# EAGLE board PROFET+_24V_Shield_wo_OL_V1.2 (EAGLE 6.2)
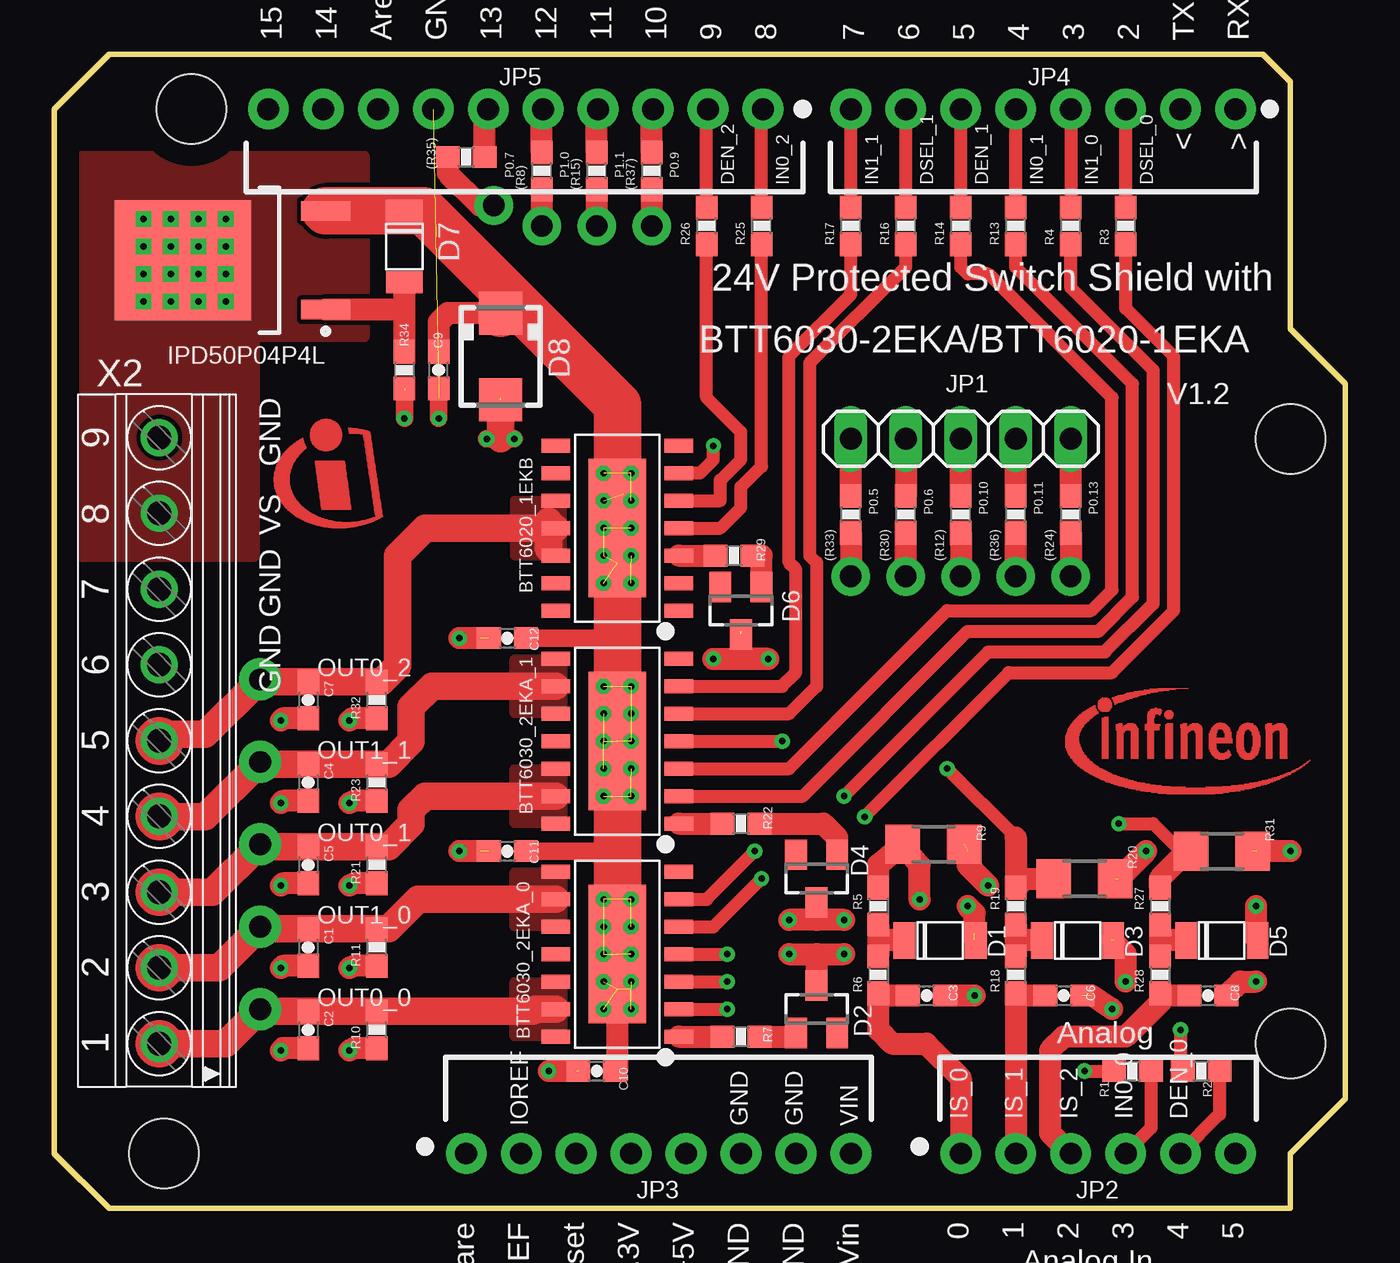
[diagram p0: board, top side]
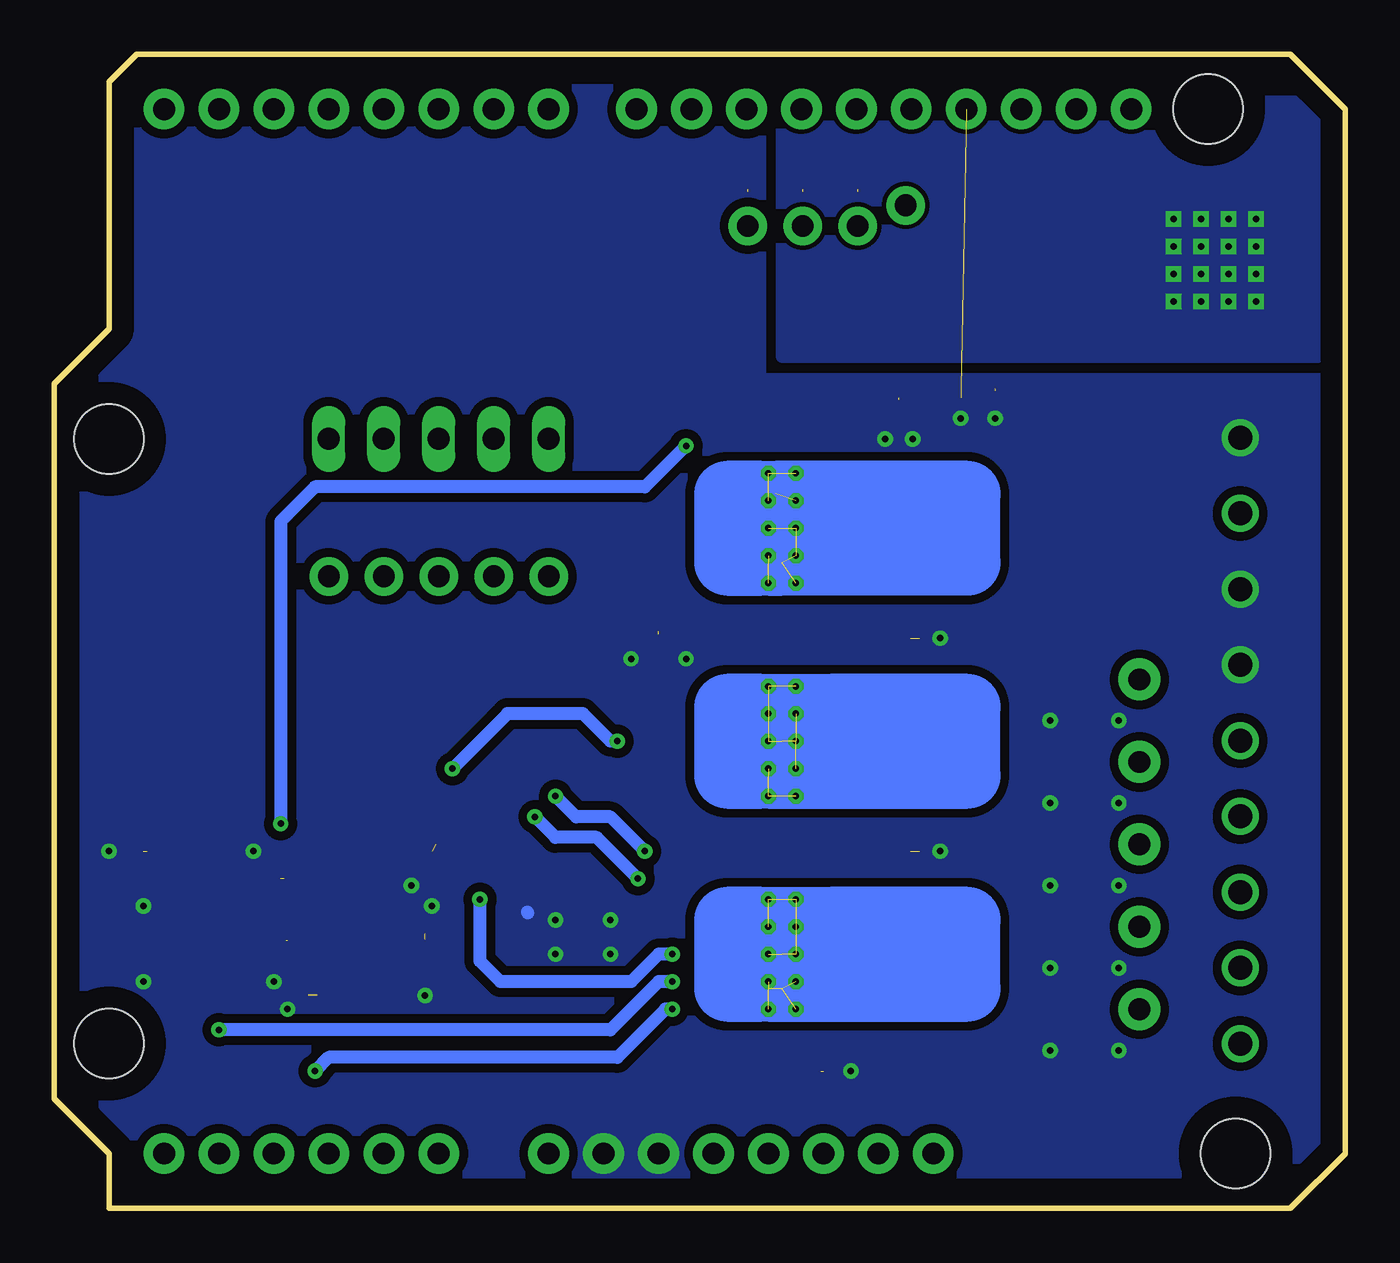
[diagram p1: board, bottom side, seen from below]

Size 59.69 x 53.34 mm. Coordinates in mm from the lower left corner, seen from the top.
Copper layers (1*16): Top 0.035mm / dielectric 1.5mm / Bottom 0.035mm
Design rules: minimum track width 10mil, minimum drill 23mil, track to track 8mil, track to pad 8mil, pad to pad 8mil, via to via 8mil, smd to smd 8mil, copper to edge 40mil, drill to drill 8mil, minimum pad ring 10mil, minimum via ring 8mil, stop-mask expansion 4mil, vias tented up to drill 0mil, thermal gap 10mil

## Footprints (pad centres in the part's own frame; a part is rotated, then mirrored left to right if it is on the bottom)
0603-RES = smd 1.1 x 1: 1 -0.85,0; 2 0.85,0
IFX_PG_DSO_14_47_EP = smd 2.65 x 6.4: EP 0,0 | smd 1.31 x 0.64: P1 -2.845,3.81; P2 -2.845,2.54; P3 -2.845,1.27; P4 -2.845,0; P5 -2.845,-1.27; P6 -2.845,-2.54; P7 -2.845,-3.81; P8 2.845,-3.81; P9 2.845,-2.54; P10 2.845,-1.27; P11 2.845,0; P12 2.845,1.27; P13 2.845,2.54; P14 2.845,3.81
IFX_PG_DSO_14_40_EP = smd 2.65 x 6.4: EP 0,0 | smd 1.31 x 0.64: P1 -2.845,3.81; P2 -2.845,2.54; P3 -2.845,1.27; P4 -2.845,0; P5 -2.845,-1.27; P6 -2.845,-2.54; P7 -2.845,-3.81; P8 2.845,-3.81; P9 2.845,-2.54; P10 2.845,-1.27; P11 2.845,0; P12 2.845,1.27; P13 2.845,2.54; P14 2.845,3.81
0603-CAP = smd 1.1 x 1: 1 -0.85,0; 2 0.85,0
SMD-PACKAGES_SOD80 = smd 1 x 1.7: A -1.65,0; K 1.65,0
SOT23 = smd 1 x 1.4: 1 -0.95,-1.1; 2 0.95,-1.1; 3 0,1.1
SMA = smd 2 x 2: A 2,0; C -2,0
INF-PG-TO252-3-313_L_1PRIMARY = smd 2.25 x 0.9: 1 -4.3,2.28; 3 -4.3,-2.28 | smd 6.3 x 5.55: 2 2.3,0
1X05 = drill 1.016 long: 1 -5.08,0; 2 -2.54,0; 3 0,0; 4 2.54,0; 5 5.08,0
R1206 = smd 1.6 x 1.803: 1 -1.422,0; 2 1.422,0
XMC1100_FOR_ARDUINO = drill 1.016 pad 1.88: 3.3V 26.67,2.54; 5V 29.21,2.54; 14 12.446,50.8; 15 9.906,50.8; A0 41.91,2.54; A1 44.45,2.54; A2 46.99,2.54; A3 49.53,2.54; A4 52.07,2.54; A5 54.61,2.54; AREF 14.986,50.8; D2 49.53,50.8; D3 46.99,50.8; D4 44.45,50.8; D5 41.91,50.8; D6 39.37,50.8; D7 36.83,50.8; D8 32.766,50.8; D9 30.226,50.8; D10 27.686,50.8; D11 25.146,50.8; D12 22.606,50.8; D13 20.066,50.8; GND@0 31.75,2.54; GND@1 34.29,2.54; GND@2 17.526,50.8; IOREF 21.59,2.54; RES 24.13,2.54; RX 54.61,50.8; SPARE 19.05,2.54; TX 52.07,50.8; VIN 36.83,2.54 | hole 3.2: 57.15,35.56; 57.15,7.62; 6.35,50.8; 5.08,2.54
1751316 = drill 1.1 pad 1.7: 1 -13.973,-0.1; 2 -10.473,-0.1; 3 -6.973,-0.1; 4 -3.473,-0.1; 5 0.028,-0.1; 6 3.527,-0.1; 7 7.027,-0.1; 8 10.527,-0.1; 9 14.027,-0.1

## Placement (x,y rotation side)
(R8)  10k  [0603-RES]  22.54,47.94 90 top
(R12)  10k  [0603-RES]  41.91,32.07 90 top
(R15)  10k  [0603-RES]  25.08,47.94 90 top
(R24)  10k  [0603-RES]  46.99,32.07 90 top
(R30)  10k  [0603-RES]  39.37,32.07 90 top
(R33)  10k  [0603-RES]  36.83,32.07 90 top
(R35)  10k  [0603-RES]  19.05,48.58 0 top
(R36)  10k  [0603-RES]  44.45,32.07 90 top
(R37)  10k  [0603-RES]  27.62,47.94 90 top
BTT6020_1EKB  INFINEON_BTS5008-1EKB_2  [IFX_PG_DSO_14_47_EP]  26.04,31.43 180 top
BTT6030_2EKA_0  INFINEON_BTS5020-2EKA  [IFX_PG_DSO_14_40_EP]  26.04,11.75 180 top
BTT6030_2EKA_1  INFINEON_BTS5020-2EKA  [IFX_PG_DSO_14_40_EP]  26.04,21.59 180 top
C1  10n  [0603-CAP]  11.75,12.07 270 top
C2  10n  [0603-CAP]  11.75,8.25 270 top
C3  100p  [0603-CAP]  40.32,9.84 0 top
C4  10n  [0603-CAP]  11.75,19.68 270 top
C5  10n  [0603-CAP]  11.75,15.88 270 top
C6  100p  [0603-CAP]  46.67,9.84 0 top
C7  10n  [0603-CAP]  11.75,23.5 270 top
C8  100p  [0603-CAP]  53.34,9.84 0 top
C9  68n  [0603-CAP]  17.78,38.73 90 top
C10  100n  [0603-CAP]  25.08,6.35 0 top
C11  100n  [0603-CAP]  20.96,16.51 0 top
C12  100n  [0603-CAP]  20.96,26.35 0 top
D1  6.8V  [SMD-PACKAGES_SOD80]  40.96,12.38 180 top
D2  BAS21  [SOT23]  35.24,9.21 0 top
D3  6.8V  [SMD-PACKAGES_SOD80]  47.31,12.38 180 top
D4  BAS21  [SOT23]  35.24,15.24 180 top
D5  6.8V  [SMD-PACKAGES_SOD80]  53.98,12.38 180 top
D6  BAS21  [SOT23]  31.75,27.62 180 top
D7  10V  [SMD-PACKAGES_SOD80]  16.19,44.45 90 top
D8  58V  [SMA]  20.64,39.37 270 top
IPD50P04P4L  INF-PG-TO252-3-313_L_1  [INF-PG-TO252-3-313_L_1PRIMARY]  8.26,43.81 180 top
JP1  [1X05]  41.91,35.56 0 top
R1  10k  [0603-RES]  49.85,6.35 0 top
R2  10k  [0603-RES]  53.02,6.35 0 top
R3  10k  [0603-RES]  49.53,45.4 90 top
R4  10k  [0603-RES]  46.99,45.4 90 top
R5  10k  [0603-RES]  38.1,13.97 270 top
R6  4.7k  [0603-RES]  38.1,10.79 270 top
R7  27  [0603-RES]  31.75,7.94 0 top
R9  1.2k  [R1206]  40.64,16.83 180 top
R10  47k  [0603-RES]  14.92,8.25 90 top
R11  47k  [0603-RES]  14.92,12.07 90 top
R13  10k  [0603-RES]  44.45,45.4 90 top
R14  10k  [0603-RES]  41.91,45.4 90 top
R16  10k  [0603-RES]  39.37,45.4 90 top
R17  10k  [0603-RES]  36.83,45.4 90 top
R18  4.7k  [0603-RES]  44.45,10.79 270 top
R19  10k  [0603-RES]  44.45,13.97 270 top
R20  1.2k  [R1206]  47.63,15.24 180 top
R21  47k  [0603-RES]  14.92,15.88 90 top
R22  27  [0603-RES]  31.75,17.78 0 top
R23  47k  [0603-RES]  14.92,19.68 90 top
R25  4.7k  [0603-RES]  32.7,45.4 90 top
R26  4.7k  [0603-RES]  30.16,45.4 90 top
R27  4.7k  [0603-RES]  51.12,13.97 270 top
R28  4.7k  [0603-RES]  51.12,10.79 270 top
R29  27  [0603-RES]  31.43,30.16 0 top
R31  1.2k  [R1206]  53.98,16.51 180 top
R32  47k  [0603-RES]  14.92,23.5 90 top
R34  10k  [0603-RES]  16.19,38.73 270 top
SHAPE1  ARDUINO_SHIELD  [XMC1100_FOR_ARDUINO]  0,0 0 top
U$3  [INFINEON_LOGO_5]  46.35,18.73 0 top
U$6  [INFINEON_ICON_5]  10.16,31.43 0 top
X2  1751316  [1751316]  4.76,21.59 90 top

## Library data of the parts
(R8) (R12) (R15) (R24) (R30) (R33) (R35) (R36) (R37) C1-C12 R1-R7 R10 R11 R13 R14 R16-R19 R21-R23 R25-R29 R32 R34 = SparkFun
BTT6020_1EKB BTT6030_2EKA_0 BTT6030_2EKA_1 = PROFET+_EAGLE_Library
D1 D3 D5 D7 = NovalithIC_H-Bridge_Demo_Board_V2_2
D2 D4 D6 = diode
D8 = diode_suppressor_smc
IPD50P04P4L = IPD50P04P4L-11
JP1 = pinhead
R9 R20 R31 = resistor
SHAPE1 = arduino
U$3 U$6 = infineon_logo
X2 = con-phoenix-350; OC_FARNELL: unknown; OC_NEWARK: unknown

## Nets
DEN_0: R2.2 SHAPE1.A4
DEN_1: R14.2 SHAPE1.D5
DEN_2: R26.2 SHAPE1.D9
DSEL_0: R3.2 SHAPE1.D2
DSEL_1: R16.2 SHAPE1.D6
GND: C1.2 C2.2 C3.2 C4.2 C5.2 C6.2 C7.2 C8.2 C9.1 C10.1 C11.1 C12.1 D1.A D2.3 D3.A D4.3 D5.A D6.3 D8.A R9.1 R10.1 R11.1 R20.1 R21.1 R23.1 R31.1 R32.1 R34.2 SHAPE1.GND@0 SHAPE1.GND@1 SHAPE1.GND@2 X2.6 X2.7 X2.9
IN0_0: R1.2 SHAPE1.A3
IN0_1: R13.2 SHAPE1.D4
IN0_2: R25.2 SHAPE1.D8
IN1_0: R4.2 SHAPE1.D3
IN1_1: R17.2 SHAPE1.D7
IS_0: C3.1 R6.2 SHAPE1.A0
IS_1: C6.1 R18.2 SHAPE1.A1
IS_2: C8.1 R28.2 SHAPE1.A2
N$1: BTT6030_2EKA_1.P5 R16.1
N$2: (R12).1
N$3: D7.A IPD50P04P4L.1 R34.1
N$4: BTT6030_2EKA_1.P6 R17.1
N$5: BTT6030_2EKA_1.P3 R14.1
N$6: D2.1 R7.2
N$7: BTT6030_2EKA_1.P2 R13.1
N$8: BTT6030_2EKA_1.P1 R22.1
N$9: BTT6030_2EKA_1.P4 R19.1 R20.2
N$10: D4.1 R22.2
N$11: D3.K R18.1 R19.2
N$12: BTT6030_2EKA_0.P5 R3.1
N$13: BTT6030_2EKA_0.P6 R4.1
N$14: BTT6030_2EKA_0.P3 R2.1
N$15: BTT6030_2EKA_0.P2 R1.1
N$16: BTT6030_2EKA_0.P1 R7.1
N$17: BTT6030_2EKA_0.P4 R5.1 R9.2
N$18: (R37).1
N$19: D1.K R5.2 R6.1
N$20: (R36).1
N$21: (R24).1
N$22: (R15).1
N$23: (R30).1
N$24: BTT6020_1EKB.P5 R26.1
N$25: BTT6020_1EKB.P4 R25.1
N$26: BTT6020_1EKB.P3 R29.1
N$27: BTT6020_1EKB.P6 R27.1 R31.2
N$28: D6.1 R29.2
N$29: D5.K R27.2 R28.1
N$31: (R33).1
N$33: (R8).1
N$34: (R35).1
OUT0_0: BTT6030_2EKA_0.P12 BTT6030_2EKA_0.P13 BTT6030_2EKA_0.P14 C2.1 R10.2 X2.1
OUT0_1: BTT6030_2EKA_1.P12 BTT6030_2EKA_1.P13 BTT6030_2EKA_1.P14 C5.1 R21.2 X2.3
OUT0_2: BTT6020_1EKB.P10 BTT6020_1EKB.P11 BTT6020_1EKB.P12 C7.1 R32.2 X2.5
OUT1_0: BTT6030_2EKA_0.P8 BTT6030_2EKA_0.P9 BTT6030_2EKA_0.P10 C1.1 R11.2 X2.2
OUT1_1: BTT6030_2EKA_1.P8 BTT6030_2EKA_1.P9 BTT6030_2EKA_1.P10 C4.1 R23.2 X2.4
P0.5: (R33).2 JP1.1
P0.6: (R30).2 JP1.2
P0.7: (R35).2 SHAPE1.D13
P0.9: (R37).2 SHAPE1.D10
P0.10: (R12).2 JP1.3
P0.11: (R36).2 JP1.4
P0.13: (R24).2 JP1.5
P1.0: (R8).2 SHAPE1.D12
P1.1: (R15).2 SHAPE1.D11
VBAT: IPD50P04P4L.2 X2.8
VS: BTT6020_1EKB.EP BTT6030_2EKA_0.EP BTT6030_2EKA_1.EP C9.2 C10.2 C11.2 C12.2 D7.K D8.C IPD50P04P4L.3

## Tracks (layer width: path | path; a pad name or v marks a point on that pad's centre or on a via)
DEN_0
  Top 0.61: R2.2 53.87,4.34 SHAPE1.A4
DEN_1
  Top 0.61: R14.2 SHAPE1.D5
DEN_2
  Top 0.61: R26.2 30.16,50.74 SHAPE1.D9
DSEL_0
  Top 0.61: R3.2 SHAPE1.D2
DSEL_1
  Top 0.61: R16.2 SHAPE1.D6
GND  (via drill 0.3)  (14 unrouted)
  Top 0.61: 31.75,25.4 31.75,26.67
  Top 0.813: 16.19,37.78 v16.19,36.51 | 17.78,37.47 v17.78,36.51 | v20,35.56 20.64,35.56 v21.27,35.56
  Top 1.016: 35.24,11.75 v36.51,11.75 | v36.51,13.34 35.24,13.34 | 35.24,13.34 v33.97,13.34 | v33.97,11.75 35.24,11.75 | 35.24,11.75 D2.3 | D3.A 48.9,12.45 | D5.A 55.56,12.45 v55.56,13.97 | C8.2 54.82,10.48 v55.56,10.48 | C3.2 v42.55,9.84 | D1.A 42.55,12.45 | C7.2 10.58,22.64 v10.48,22.54 | R32.1 13.76,22.64 v13.65,22.54 | C4.2 10.58,18.84 v10.48,18.73 | R23.1 13.87,18.84 v13.65,18.73 | C5.2 10.58,15.03 v10.48,14.92 | R21.1 13.87,15.03 v13.65,14.92 | C1.2 10.58,11.21 v10.48,11.11 | R11.1 13.87,11.21 v13.65,11.11 | R10.1 13.87,7.41 v13.65,7.3 | C2.2 10.58,7.41 v10.48,7.3 | D4.3 35.24,13.34 | v57.15,16.51 55.56,16.51 | 49.21,15.24 v50.48,16.51 | v49.53,10.48 49.53,11.75 48.9,12.38 | v48.9,9.21 47.94,9.84 | 42.55,12.7 42.55,13.65 v42.23,13.97 | 42.23,16.51 42.23,15.88 v43.18,14.92 | 19.68,26.35 v18.73,26.35 | 19.68,16.51 v18.73,16.51 | 24.13,6.35 v22.86,6.35 | v30.48,25.4 v33.02,25.4 31.75,25.4
  Top 1.27: 20.64,35.56 20.64,37.47
  Bottom 0.61: 37.82,13.69 37.78,13.65
  pour Bottom (isolate 0.406, no thermals): 1.27,38.42 1.27,1.59 58.42,1.59 58.42,51.75 26.99,51.75 26.99,38.42
IN0_0
  Top 0.61: R1.2 50.7,3.71 SHAPE1.A3
IN0_1
  Top 0.61: R13.2 SHAPE1.D4
IN0_2
  Top 0.61: R25.2 32.7,50.74 SHAPE1.D8
IN1_0
  Top 0.61: SHAPE1.D3 R4.2
IN1_1
  Top 0.61: R17.2 SHAPE1.D7
IS_0
  Top 1.016: C3.1 38.2,9.84 R6.2 38.1,8.25 38.74,7.62 40.32,7.62 41.91,6.03 SHAPE1.A0
IS_1
  Top 1.016: R18.2 44.55,9.84 | 44.55,9.84 C6.1 | 44.55,9.84 44.45,9.74 SHAPE1.A1
IS_2
  Top 1.016: R28.2 51.22,9.84 | 51.22,9.84 C8.1 | 51.22,9.84 51.22,9.63 49.53,7.94 46.67,7.94 46.04,7.3 46.04,3.49 SHAPE1.A2
N$1
  Top 0.61: BTT6030_2EKA_1.P5 33.97,22.86 35.24,24.13 35.24,29.85 34.93,30.16 34.93,39.05 39.37,43.5 R16.1
N$2  (via drill 1 pad 1.78)
  Top 1.016: (R12).1 v41.91,29.21
N$3
  Top 1.016: R34.1 16.19,41.54 | 16.19,41.54 D7.A | 16.19,41.54 IPD50P04P4L.1
N$4
  Top 0.61: BTT6030_2EKA_1.P6 33.66,24.13 34.29,24.77 34.29,29.53 33.97,29.85 33.97,39.37 36.83,42.23 R17.1
N$5
  Top 0.61: BTT6030_2EKA_1.P3 33.97,20.32 41.27,27.62 47.94,27.62 48.9,28.57 48.9,37.47 43.18,43.18 42.23,43.18 41.91,43.5 R14.1 41.91,44.45
N$6
  Top 1.016: R7.2 34.14,7.94 34.14,7.93 D2.1
N$7
  Top 0.61: BTT6030_2EKA_1.P2 34.61,19.05 42.23,26.67 48.26,26.67 49.85,28.26 49.85,38.1 44.45,43.5 R13.1
N$8
  Top 1.016: BTT6030_2EKA_1.P1 R22.1
N$9  (via drill 0.3)
  Top 0.61: BTT6030_2EKA_1.P4 v33.66,21.59 | v41.27,20.32 44.45,17.14
  Top 1.016: 44.45,17.14 R19.1 44.87,15.24 R20.2
  Bottom 0.61: v33.66,21.59 33.97,21.59 35.24,22.86 38.74,22.86 v41.27,20.32
N$10
  Top 1.016: R22.2 35.56,17.78 36.2,17.14 D4.1
N$11
  Top 1.016: R19.2 44.45,12.38 | 44.45,12.38 R18.1 | D3.K 44.45,12.38
N$12  (via drill 0.3)
  Top 0.61: BTT6030_2EKA_0.P5 30.48,13.02 v32.7,15.24 | v37.46,18.1 44.13,24.77 48.9,24.77 51.75,27.62 51.75,39.37 49.53,41.59 R3.1
  Bottom 0.61: v32.7,15.24 34.61,17.14 36.51,17.14 v37.46,18.1
N$13  (via drill 0.3)
  Top 0.61: BTT6030_2EKA_0.P6 30.16,14.29 v32.38,16.51 | v36.51,19.05 43.18,25.72 48.58,25.72 50.8,27.94 50.8,38.73 46.99,42.55 R4.1
  Bottom 0.61: v32.38,16.51 33.97,18.1 35.56,18.1 v36.51,19.05
N$14  (via drill 0.3)
  Top 0.61: BTT6030_2EKA_0.P3 v31.12,10.48 | v52.07,8.25 52.07,6.77 R2.1
  Bottom 0.61: v31.12,10.48 31.75,10.48 33.97,8.25 v52.07,8.25
N$15  (via drill 0.3)
  Top 0.61: BTT6030_2EKA_0.P2 v31.12,9.21 | v47.63,6.35 R1.1
  Bottom 0.61: v31.12,9.21 31.43,9.21 33.66,6.98 46.99,6.98 v47.63,6.35
N$16
  Top 1.016: BTT6030_2EKA_0.P1 R7.1
N$17  (via drill 0.3)
  Top 0.61: BTT6030_2EKA_0.P4 v31.12,11.75
  Top 1.016: R5.1 38.1,15.89 R9.2 40.01,15.86 v40.01,14.29
  Bottom 0.61: v31.12,11.75 31.75,11.75 33.02,10.48 39.05,10.48 40.01,11.43 v40.01,14.29
N$18  (via drill 1 pad 1.78)  (1 unrouted)
  Top 1.016: 27.62,46.99 v27.62,45.4
N$19
  Top 1.016: R5.2 38.1,12.38 | 38.1,12.38 R6.1 | D1.K 38.1,12.38
N$20  (via drill 1 pad 1.78)
  Top 1.016: v44.45,29.21 (R36).1
N$21  (via drill 1 pad 1.78)
  Top 1.016: (R24).1 v46.99,29.21
N$22  (via drill 1 pad 1.78)  (1 unrouted)
  Top 1.016: 25.08,46.99 v25.08,45.4
N$23  (via drill 1 pad 1.78)
  Top 1.016: v39.37,29.21 (R30).1
N$24
  Top 0.61: BTT6020_1EKB.P5 30.8,32.7 30.8,33.66 31.75,34.61 31.75,35.88 30.16,37.47 R26.1
N$25
  Top 0.61: BTT6020_1EKB.P4 30.8,31.43 31.75,32.39 31.75,33.34 32.7,34.29 R25.1
N$26
  Top 1.016: BTT6020_1EKB.P3 R29.1
N$27  (via drill 0.3)
  Top 0.61: R27.1 51.12,14.92 | v30.48,35.24 30.48,34.61 29.85,33.97 BTT6020_1EKB.P6 | 52.22,16.36 50.8,17.78 v49.21,17.78
  Top 1.016: R27.1 51.12,15.25 52.22,16.36 R31.2
  Bottom 0.61: v30.48,35.24 32.38,33.34 47.63,33.34 49.21,31.75 v49.21,17.78
N$28
  Top 1.016: D6.1 32.7,30.16 R29.2
N$29
  Top 1.016: R27.2 51.12,12.38 | 51.12,12.38 R28.1 | D5.K 51.12,12.38
N$31  (via drill 1 pad 1.78)
  Top 1.016: (R33).1 v36.83,29.21
N$33  (via drill 1 pad 1.78)  (1 unrouted)
  Top 1.016: 22.54,46.99 v22.54,45.4
N$34  (via drill 1 pad 1.78)
  Top 1.016: 20,46.36 v20.32,46.36 19.68,46.36 18.2,47.84 (R35).1
OUT0_0  (via drill 1 pad 1.93)
  Top 1.27: X2.1 7.94,7.62 9.42,9.11 9.52,9.11 | 9.52,9.11 C2.1 R10.2 22.12,9.11 22.23,9.21 BTT6030_2EKA_0.P13 | v9.52,9.21 9.52,9.11
  Top 2.184: X2.1
  pour Top (no thermals): 23.49,10.48 23.49,7.94 21.27,7.94 21.27,10.48
OUT0_1  (via drill 1 pad 1.93)
  Top 1.27: 9.42,16.72 C5.1 R21.2 15.46,16.72 16.51,17.78 16.51,18.42 17.15,19.05 BTT6030_2EKA_1.P13 | 9.42,16.72 7.3,14.61 4.88,14.61 | 9.42,16.72 v9.52,16.83
  Top 2.184: 4.88,14.61 X2.3
  pour Top (no thermals): 23.49,20.32 23.49,17.78 21.27,17.78 21.27,20.32
OUT0_2  (via drill 1 pad 1.93)
  Top 0.813: v9.52,24.45 9.52,24.35
  Top 1.27: 4.89,21.59 5.21,21.91 6.98,21.91 9.42,24.35 9.52,24.35 C7.1 R32.2 15.14,24.35 15.88,25.08 15.88,30.16 17.15,31.43 BTT6020_1EKB.P11 | 22.86,31.75 22.86,30.48
  Top 2.184: 4.89,21.59 X2.5
  pour Top (no thermals): 21.27,30.16 23.49,30.16 23.49,32.7 21.27,32.7
OUT1_0  (via drill 1 pad 1.93)
  Top 1.27: X2.2 7.62,11.11 9.42,12.92 | 9.42,12.92 C1.1 R11.2 15.46,12.92 16.83,14.29 BTT6030_2EKA_0.P9 | 9.42,12.92 v9.52,13.02
  Top 2.184: X2.2
  pour Top (no thermals): 23.49,15.56 23.49,13.02 21.27,13.02 21.27,15.56
OUT1_1  (via drill 1 pad 1.93)
  Top 0.813: v9.52,20.64 9.52,20.54
  Top 1.27: 4.88,18.1 6.98,18.1 9.42,20.54 9.52,20.54 C4.1 R23.2 15.46,20.54 16.51,21.59 16.51,23.18 17.46,24.13 BTT6030_2EKA_1.P9
  Top 2.184: 4.88,18.1 X2.4
  pour Top (no thermals): 23.49,25.4 23.49,22.86 21.27,22.86 21.27,25.4
P0.5
  Top 1.016: (R33).2 JP1.1
P0.6
  Top 1.016: JP1.2 (R30).2
P0.7
  Top 1.016: (R35).2 19.9,50.63 SHAPE1.D13
P0.9
  Top 1.016: (R37).2 27.62,50.74 SHAPE1.D10
P0.10
  Top 1.016: (R12).2 JP1.3
P0.11
  Top 1.016: (R36).2 JP1.4
P0.13
  Top 1.016: (R24).2 JP1.5
P1.0
  Top 1.016: (R8).2 22.54,50.8 SHAPE1.D12
P1.1
  Top 1.016: (R15).2 25.08,50.8 SHAPE1.D11
VBAT  (via drill 0.3)
  other vias: 4.13,41.91 4.13,43.18 4.13,44.45 4.13,45.72 5.4,45.72 6.67,45.72 7.94,45.72 7.94,44.45 6.67,44.45 5.4,44.45 5.4,43.18 6.67,43.18 7.94,43.18 7.94,41.91 6.67,41.91 5.4,41.91
  pour Top (no thermals): 1.27,48.58 14.29,48.58 14.29,40.32 9.21,40.32 9.21,30.16 1.27,30.16
  pour Bottom: 1.27,51.12 26.04,51.12 26.04,39.37 1.27,39.37
VS  (via drill 0.3)  (34 unrouted)
  Top 0.813: C12.2 26.04,26.35 | C11.2 26.04,16.51
  Top 1.016: D8.C 18.19,41.37 17.78,40.96 C9.2 | C10.2 26.04,6.45 26.04,10.16
  Top 2.184: BTT6030_2EKA_0.EP 26.04,16.51 BTT6030_2EKA_1.EP 26.04,26.35 BTT6020_1EKB.EP 26.04,37.15 21.59,41.59 | 21.59,41.59 17.08,46.1 D7.K IPD50P04P4L.3 | D8.C 20.86,41.59 21.59,41.59
  Bottom 3.048: 26.99,20 28.57,20 28.57,23.18 26.99,23.18 26.99,20 | 26.67,20 20,21.27 26.67,23.18 23.81,23.18 | 23.81,23.18 24.13,20 | 24.13,20 17.46,20 17.46,23.18 23.81,23.18 | 26.67,20 24.13,20 | 26.67,20 26.99,20 | 26.99,10.16 28.57,10.16 28.57,13.34 26.99,13.34 26.99,10.16 | 26.67,10.16 19.68,11.43 26.67,13.34 23.81,13.34 | 23.81,13.34 24.13,10.16 | 24.13,10.16 17.46,10.16 17.46,13.34 23.81,13.34 | 26.67,10.16 24.13,10.16 | 26.67,10.16 26.99,10.16 | 26.99,29.85 28.57,29.85 28.57,33.02 26.99,33.02 26.99,29.85 | 26.67,29.85 26.67,33.02 26.35,33.02 | 26.35,33.02 19.68,31.43 26.04,29.85 | 26.04,29.85 17.46,29.85 17.46,33.02 26.35,33.02 | 26.67,29.85 26.04,29.85 | 26.67,29.85 26.99,29.85
  other vias: 25.4,33.97 26.67,33.97 25.4,32.7 25.4,31.43 25.4,30.16 25.4,28.89 26.67,28.89 26.67,31.43 26.67,32.7 26.67,24.13 25.4,24.13 26.67,22.86 25.4,22.86 25.4,21.59 26.67,21.59 26.67,20.32 26.67,19.05 25.4,19.05 25.4,20.32 26.67,14.29 25.4,14.29 25.4,13.02 26.67,13.02 26.67,11.75 25.4,11.75 26.67,10.48 26.67,9.21 25.4,9.21 26.67,30.16 25.4,10.48

## Text on the board
tNames: JP5 | JP4 | P0.7 | P1.0 | P1.1 | P0.9 | DEN_2 | IN0_2 | IN1_1 | DSEL_1 | DEN_1 | IN0_1 | IN1_0 | DSEL_0 | 24V Protected Switch Shield with | BTT6030-2EKA/BTT6020-1EKA | V1.2 | GND | P0.5 | P0.6 | P0.10 | P0.11 | P0.13 | VS | GND | OUT0_2 | GND | OUT1_1 | OUT0_1 | OUT1_0 | OUT0_0 | Analog | IOREF | GND | GND | VIN | IS_0 | IS_1 | IS_2 | IN0_0 | DEN_0 | JP3 | JP2